# Allegro board IMLAB_F103C8.brd
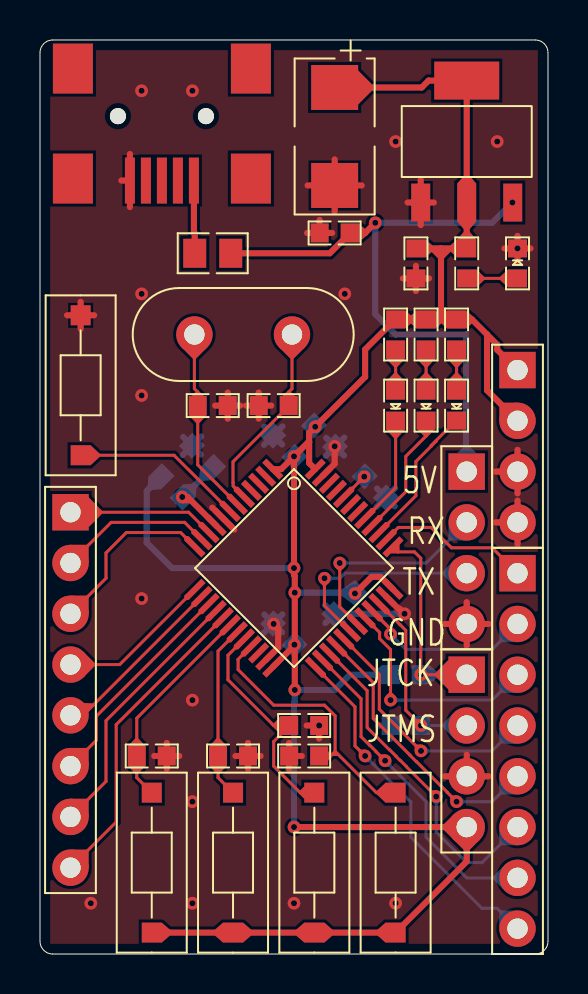
[diagram p0: board, top side]
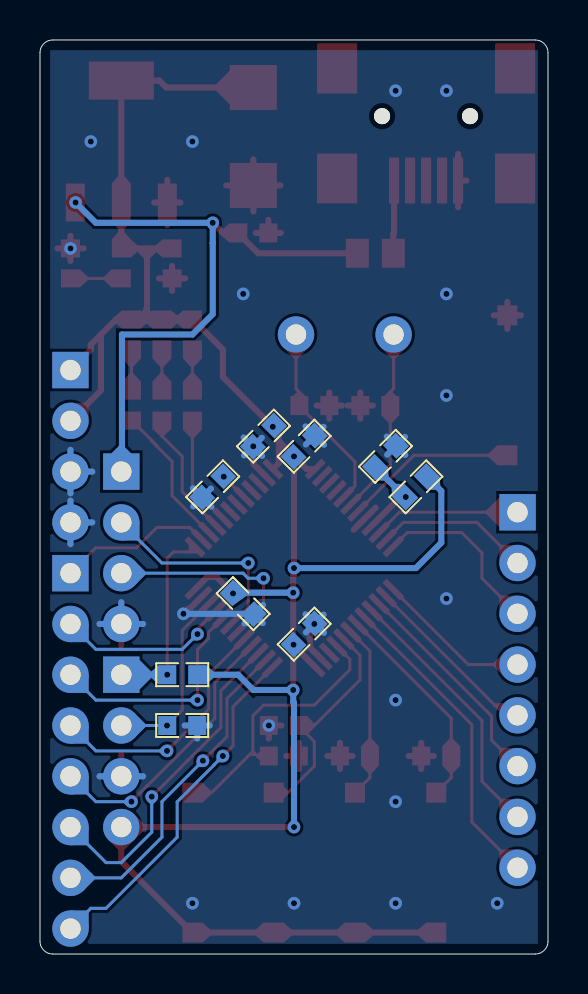
[diagram p1: board, bottom side, seen from below]

Outline 25.4 x 45.72 mm; copper layers: TOP, BOTTOM. Coordinates in mm from the lower left corner of the outline.
Outline path: 0,45.09 0,0.64 arc(0.19,0.19) 0.64,0 24.77,0 arc(25.21,0.19) 25.4,0.64 25.4,45.09 arc(25.21,45.53) 24.77,45.72 0.64,45.72 arc(0.19,45.53) 0,45.09

## Placement (name value [footprint] x y rotation side)
C1  20pF  [C0603]  11.68 27.43 180 top
C2  20pF  [C0603]  8.64 27.43 0 top
C3  1uF  [C0603]  14.73 36.07 0 top
C4  100uF  [C1812]  14.73 40.89 270 top
C5  100nF  [C0603]  18.8 34.54 90 top
C7  100nF  [C0603]  8.13 24.89 315 bottom
C8  100nF  [C0603]  12.19 25.4 315 bottom
C9  100nF  [C0603]  12.19 16 315 bottom
C10  100nF  [C0603]  15.24 17.53 45 bottom
C11  100nF  [C0603]  14.22 25.91 135 bottom
D1  LED  [LED0603]  23.88 34.54 270 top
D2  LED  [LED0603]  17.78 27.43 90 top
D3  LED  [LED0603]  19.3 27.43 90 top
D4  LED  [LED0603]  20.83 27.43 90 top
F1  500mA  [SF0805]  8.64 35.05 0 top
J1  Header4x1  [HEADER4X1]  21.34 20.32 0 top
J2  Header4x1  [HEADER4X1]  21.34 10.16 0 top
J3  Header8x1  [HEADER8X1]  1.52 13.21 0 top
J4  Header8x1  [HEADER8X1]  23.88 10.16 0 top
J5  Header4x1  [HEADER4X1]  23.88 25.4 0 top
L1  BEAD  [L0603]  6.6 23.37 315 bottom
R1  510R  [R0603]  21.34 34.54 90 top
R2  100K  [R0603]  16.76 23.37 135 bottom
R3  10K  [R0603]  18.29 13.97 180 bottom
R4  10K  [R0603]  18.29 11.43 180 bottom
R5  10K  [R0603]  5.59 9.91 180 top
R6  510R  [R0603]  17.78 30.99 90 top
R7  10K  [R0603]  9.65 9.91 180 top
R8  510R  [R0603]  19.3 30.99 90 top
R9  10K  [R0603]  13.21 11.43 180 top
R10  10K  [R0603]  13.21 9.91 0 top
R11  510R  [R0603]  20.83 30.99 90 top
S1  Switch_2pin  [SW3X6]  2.03 28.45 270 top
S2  Switch_2pin  [SW3X6]  5.59 4.57 90 top
S3  Switch_2pin  [SW3X6]  9.65 4.57 90 top
S4  Switch_2pin  [SW3X6]  13.72 4.57 90 top
S5  Switch_2pin  [SW3X6]  17.78 4.57 90 top
U1  STM32F103x8/B_LQFP48  [LQFP48P700X700]  12.7 19.3 225 top
U2  MiniUSB  [MINIUSB]  6.1 40.64 180 top
U3  AMS1117  [SOT223]  21.34 40.64 90 top
X1  8M  [HC49S]  10.16 30.99 0 top

## Library data of the parts
C1-C3 C5 C7-C11 = Capacitor
C4 = TCapactior
D1-D4 = LED
F1 = SafetyFuse
J1 J2 J5 = Header4x1
J3 J4 = Header8x1
L1 = Inductor
R1-R5 R7 R9 R10 = Resistor
R6 R8 R11 = R
S1-S5 = Switch_2pin
U1 = STM32F103x8/B_LQFP48
U2 = MiniUSB
U3 = AMS1117
X1 = Xtal

## Footprints (pads in the part's own frame, mm; a bottom-side part is the same pattern mirrored in y, then rotated)
C0603
  rect 0.9x0.95 smd: 1(-0.75,0) 2(0.75,0)
C1812
  rect 2.25x2.35 smd: 1(-2.45,0) 2(2.45,0)
HC49S
  round 1.82 hole 1.02: 1(-2.44,0) 2(2.44,0)
HEADER4X1
  rect 1.82x1.82 hole 1.02: 1(0,3.81)
  round 1.82 hole 1.02: 2(0,1.27) 3(0,-1.27) 4(0,-3.81)
HEADER8X1
  rect 1.82x1.82 hole 1.02: 1(0,8.89)
  round 1.82 hole 1.02: 2(0,6.35) 3(0,3.81) 4(0,1.27) 5(0,-1.27) 6(0,-3.81) 7(0,-6.35) 8(0,-8.89)
L0603
  rect 0.9x0.95 smd: 1(-0.75,0) 2(0.75,0)
LED0603
  rect 0.9x0.95 smd: 1(-0.75,0) 2(0.75,0)
LQFP48P700X700
  rect 0.3x1.2 smd: 1(-2.75,-4.25) 2(-2.25,-4.25) 3(-1.75,-4.25) 4(-1.25,-4.25) 5(-0.75,-4.25) 6(-0.25,-4.25) 7(0.25,-4.25) 8(0.75,-4.25) 9(1.25,-4.25) 10(1.75,-4.25) 11(2.25,-4.25) 12(2.75,-4.25) 25(2.75,4.25) 26(2.25,4.25) 27(1.75,4.25) 28(1.25,4.25) 29(0.75,4.25) 30(0.25,4.25) 31(-0.25,4.25) 32(-0.75,4.25) 33(-1.25,4.25) 34(-1.75,4.25) 35(-2.25,4.25) 36(-2.75,4.25)
  rect 1.2x0.3 smd: 13(4.25,-2.75) 14(4.25,-2.25) 15(4.25,-1.75) 16(4.25,-1.25) 17(4.25,-0.75) 18(4.25,-0.25) 19(4.25,0.25) 20(4.25,0.75) 21(4.25,1.25) 22(4.25,1.75) 23(4.25,2.25) 24(4.25,2.75) 37(-4.25,2.75) 38(-4.25,2.25) 39(-4.25,1.75) 40(-4.25,1.25) 41(-4.25,0.75) 42(-4.25,0.25) 43(-4.25,-0.25) 44(-4.25,-0.75) 45(-4.25,-1.25) 46(-4.25,-1.75) 47(-4.25,-2.25) 48(-4.25,-2.75)
MINIUSB
  rect 2x2.5 smd: (-4.45,1.85) (-4.45,-3.65) (4.45,1.85) (4.45,-3.65)
  round 0.8 hole 0.9 unplated: (-2.2,-1.27) (2.2,-1.27)
  rect 0.5x2.3 smd: 1(-1.6,1.95) 2(-0.8,1.95) 3(0,1.95) 4(0.8,1.95) 5(1.6,1.95)
R0603
  rect 0.9x0.95 smd: 1(-0.75,0) 2(0.75,0)
SF0805
  rect 1.15x1.45 smd: 1(-0.9,0) 2(0.9,0)
SOT223
  rect 1.9x0.95 smd: 1(-3.05,2.3) 2(-3.05,0) 3(-3.05,-2.3)
  rect 1.9x3.25 smd: 4(3.05,0)
SW3X6
  rect 1x1 smd: 1(-3.5,0) 2(3.5,0)

## Nets
AVDD: C7.2 L1.2 U1.9(VDDA)
GND: C1.2 C2.2 C3.1 C4.2 C5.1 C7.1 C8.1 C9.1 C10.1 C11.1 D1.1 J1.4 J2.3 J5.3 J5.4 R2.1 R4.2 R5.1 R7.1 R9.1 R10.1 S1.1 U1.8(VSSA) U1.23(VSS_1) U1.35(VSS_2) U1.47(VSS_3) U2.5(GND) U3.1(ADJ)
VDD: C4.1 C5.2 C8.2 C9.2 C10.2 C11.2 J2.4 J5.1 J5.2 L1.1 R1.2 R3.2 R6.2 R8.2 R11.2 S2.1 S3.1 S4.1 S5.1 U1.1(VBAT) U1.24(VDD_1) U1.36(VDD_2) U1.48(VDD_3) U3.2(VOUT1) U3.4(VOUT2)
BOOT0: R2.2 U1.44(BOOT0)
JTCK: J2.1 R3.1 U1.37(PA14)
JTMS: J2.2 R4.1 U1.34(PA13)
KEY0: R5.2 S2.2 U1.18(PB0)
KEY1: R7.2 S3.2 U1.19(PB1)
KEY2: R9.2 S4.2 U1.20(PB2)
KEY3: R10.2 S5.2 U1.21(PB10)
LED0: D4.1 U1.39(PB3)
LED1: D3.1 U1.40(PB4)
LED2: D2.1 U1.41(PB5)
NRST: S1.2 U1.7(NRST)
OSC_IN: C1.1 U1.5(PD0/OSC_IN) X1.2
OSC_OUT: C2.1 U1.6(PD1/OSC_OUT) X1.1
PA0: J3.1 U1.10(PA0/WKUP)
PA1: J3.2 U1.11(PA1)
PA2: J3.3 U1.12(PA2)
PA3: J3.4 U1.13(PA3)
PA4: J3.5 U1.14(PA4)
PA5: J3.6 U1.15(PA5)
PA6: J3.7 U1.16(PA6)
PA7: J3.8 U1.17(PA7)
PA8: J4.4 U1.29(PA8)
PA11: J4.3 U1.32(PA11)
PA12: J4.2 U1.33(PA12)
PA15: J4.1 U1.38(PA15)
PB12: J4.8 U1.25(PB12)
PB13: J4.7 U1.26(PB13)
PB14: J4.6 U1.27(PB14)
PB15: J4.5 U1.28(PB15)
RX: J1.2 U1.31(PA10)
TX: J1.3 U1.30(PA9)
U5V: C3.2 F1.2 J1.1 U3.3(VIN)
N01106: F1.1 U2.1(VCC)
N03159: D1.2 R1.1
N03492: U1.2(PC13/TAMPER/RTC)
N03498: U1.3(PC14/OSC32_IN)
N03504: U1.4(PC15/OSC32_OUT)
N04713: U1.22(PB11)
N05040: U1.46(PB9)
N05044: U1.45(PB8)
N05052: U1.43(PB7)
N05056: U1.42(PB6)
N149340: D3.2 R8.1
N149344: D4.2 R11.1
N149364: D2.2 R6.1

Pads without a net: U2 2 3 4

## Via types
v1: diameter 0.635, hole 0.305, TOP to BOTTOM, 42 vias

## Routing (per net, layer and track width the routed paths; a pad name or vN(x,y) marks a point on that pad's centre or on a via; arc(x,y) is an arc through that point)
AVDD: length 4.4
  TOP w0.305: U1.9 7.38,22.86 v1(7.11,22.86)
  BOTTOM w0.305: C7.2 L1.2
GND: length 88.2
  TOP w0.305: 9.39,26.78 C2.2 ; C2.2 10.01,27.43 ; C2.2 8.76,27.43 ; C2.2 9.39,28.08 ; J2.3 21.34,9.98 ; J2.3 20.25,8.89 ; J2.3 22.42,8.89 ; 18.38,37.59 U3.1 ; U3.1 19.04,38.72 ; U3.1 19.69,37.59 ; U3.1 19.04,36.46 ; 12.46,9.25 R10.1 ; R10.1 12.46,10.56 ; R10.1 13.09,9.91 ; 18.14,33.79 C5.1 ; C5.1 19.45,33.79 ; C5.1 18.8,33.17 ; C5.1 18.8,34.42 ; J5.3 23.88,25.22 ; J5.3 22.79,24.13 ; J5.3 23.88,23.04 ; 5.71,9.91 R5.1 ; R5.1 6.97,9.91 ; R5.1 6.34,10.56 ; R5.1 6.34,9.25 ; 10.4,9.25 R7.1 ; R7.1 9.77,9.91 ; R7.1 10.4,10.56 ; R7.1 11.03,9.91 ; 4.5,37.36 U2.5 ; U2.5 4.07,38.69 ; U2.5 4.5,40.02 ; 23.22,35.29 v1(23.88,35.29) ; v1(23.88,35.29) 24.53,35.29 ; v1(23.88,35.29) 23.88,35.92 ; v1(23.88,35.29) 23.88,34.67 ; U1.23 11.91,15.33 11.91,16.29 v1(11.68,16.51) ; 9.71,21.23 U1.8 8.61,22.33 ; S1.1 2.71,31.95 ; S1.1 2.03,31.27 ; S1.1 2.03,32.63 ; S1.1 1.35,31.95 ; C4.2 14.73,39.75 ; C4.2 13.38,38.44 ; C4.2 16.08,38.44 ; C4.2 14.73,37.14 ; 10.93,26.78 C1.2 ; C1.2 10.31,27.43 ; C1.2 11.56,27.43 ; C1.2 10.93,28.08 ; 21.34,15.42 J1.4 ; J1.4 22.42,16.51 ; J1.4 21.34,17.6 ; J1.4 20.25,16.51 ; 13.33,11.43 v1(13.96,11.43) 13.96,10.78 ; 13.35,36.07 C3.1 ; C3.1 14.61,36.07 ; C3.1 13.98,36.72 ; U1.35 17.92,17.27 17.98,17.27 v1(18.23,17.02) ; 23.88,20.5 J5.4 ; J5.4 22.79,21.59 ; J5.4 23.88,22.68 ; U1.47 14.74,24.52 v1(14.74,25.4)
  BOTTOM w0.305: 22.79,21.59 J5.4 ; J5.4 23.88,20.5 ; J5.4 23.88,22.68 ; 22.42,8.89 J2.3 20.25,8.89 ; J1.4 22.42,16.51 ; J1.4 20.25,16.51 ; J1.4 21.34,17.6 ; 14.31,25.82 C11.1 ; C11.1 14.29,24.92 ; C11.1 15.22,25.84 ; C11.1 15.2,24.93 ; C9.1 12.11,16.09 ; C9.1 11.22,16.98 ; C9.1 12.12,16.99 ; C9.1 11.2,16.07 ; 16.83,22.38 R2.1 ; R2.1 17.74,22.39 ; R2.1 17.76,23.3 ; R2.1 16.85,23.28 ; 11.22,26.37 C8.1 ; C8.1 12.11,25.49 ; C8.1 12.12,26.39 ; C8.1 11.2,25.47 ; C7.1 8.04,24.98 ; C7.1 7.15,25.87 ; C7.1 7.14,24.96 ; C7.1 8.06,25.88 ; 14.25,17.46 C10.1 ; C10.1 15.17,16.53 ; C10.1 14.27,16.55 ; C10.1 14.73,17.02 v1(18.23,17.02) ; 23.88,23.04 J5.3 ; J5.3 22.79,24.13 ; J5.3 23.88,25.22 ; R4.2 18.17,11.43 ; R4.2 16.91,11.43 ; R4.2 17.54,10.78
  vias: v1(2.54,2.54) v1(5.08,43.18) v1(5.08,33.02) v1(5.08,27.94) v1(5.08,17.78) v1(7.62,43.18) v1(7.62,12.7) v1(7.62,7.62) v1(7.62,2.54) v1(12.7,2.54) v1(15.24,33.02) v1(17.78,40.64) v1(17.78,2.54) v1(22.86,40.64)
VDD: length 115.2
  TOP w0.305: v1(12.7,6.35) J2.4 21.34,4.63 S5.1 S4.1 S3.1 S2.1 ; v1(12.7,24.89) v1(12.7,19.3) 12.7,18.96 12.74,18.92 v1(12.74,18.07) 12.74,15.45 ; v1(12.7,24.89) 12.06,24.25 U1.1 ; v1(12.7,24.89) 13.41,25.61 13.46,25.61 ; 20.07,31.74 R11.2 21.6,31.74 22.35,30.99 ; 20.07,31.74 R8.2 R6.2 17.76,31.74 16.26,30.24 16.26,28.87 v1(13.76,26.37) 13.46,26.07 13.46,25.61 ; 20.07,31.74 20.07,32.29 20.05,32.31 20.05,35.29 ; 22.35,30.99 22.35,28.19 J5.2 ; 22.35,30.99 22.86,30.48 22.86,30.23 J5.1 ; 20.05,35.29 C5.2 ; 20.05,35.29 R1.2 U3.2 U3.4 19.43,43.69 19.09,43.34 C4.1 ; v1(12.72,15.47) 12.72,15.44 ; 12.72,15.44 U1.24 ; 12.72,15.44 12.74,15.45 ; U1.48 13.46,24.56 13.46,25.61 ; U1.36 17.03,18.87 16.58,18.87 v1(15.75,18.03) ; 12.74,15.45 v1(12.74,13.21)
  BOTTOM w0.305: v1(12.74,18.07) 15.75,18.07 C10.2 ; R3.2 15.49,13.97 14.73,13.21 v1(12.74,13.21) 12.74,12.61 12.7,12.57 v1(12.7,6.35) ; L1.1 5.33,23.16 5.33,20.57 6.6,19.3 v1(12.7,19.3) ; C8.2 v1(12.7,24.89)
BOOT0: length 1.5
  TOP w0.152: U1.44 v1(16.21,23.88)
JTCK: length 12.3
  TOP w0.152: 18.8,13.97 v1(19.04,13.97) ; v1(19.04,13.97) J2.1 ; v1(19.04,13.97) 19.04,19.8 18.72,20.11 17.9,20.11 U1.37
  BOTTOM w0.152: J2.1 v1(19.04,13.97)
JTMS: length 9.3
  TOP w0.152: U1.34 17.68,16.8 17.68,16.79 18,16.47 18.01,16.47 18.29,16.19 18.29,12.19 v1(19.05,11.43)
  BOTTOM w0.152: J2.2 v1(19.05,11.43) R4.1
KEY0: length 10.7
  TOP w0.152: U1.18 4.84,11.8 R5.2 4.84,8.82 S2.2
KEY1: length 8.8
  TOP w0.152: S3.2 8.9,8.82 R7.2 8.9,15.15 U1.19
KEY2: length 11.3
  TOP w0.152: S4.2 13.01,8.07 11.68,9.4 11.68,10.63 12.46,11.41 R9.2 11.68,11.43 9.4,13.72 9.4,14.94 U1.20
KEY3: length 13.8
  TOP w0.152: 14.76,10.13 14.76,11.91 14.22,12.45 11.68,12.45 9.91,14.22 9.91,14.73 9.9,14.74 U1.21 ; 14.76,10.13 16.82,8.07 S5.2 ; 14.76,10.13 14.53,9.91 R10.2
LED0: length 7.6
  TOP w0.152: 19.56,25.4 19.81,25.65 19.81,25.69 ; 19.56,25.4 18.8,24.64 18.8,22.93 U1.39 ; 19.56,25.4 19.56,25.44 19.81,25.69 ; D4.1 20.8,26.68 19.81,25.69
LED1: length 6.4
  TOP w0.152: D3.1 19.3,25.91 18.29,24.89 18.29,23.12 U1.40
LED2: length 5.5
  TOP w0.152: U1.41 17.78,23.32 D2.1
NRST: length 8.7
  TOP w0.152: S1.2 6.7,24.95 U1.7
OSC_IN: length 9.6
  TOP w0.152: U1.5 9.66,23.41 9.66,23.58 9.65,23.58 9.65,24.62 12.43,27.41 C1.1 12.43,28.11 12.6,28.28 X1.2
OSC_OUT: length 9.4
  TOP w0.152: U1.6 7.89,24.47 C2.1 7.89,28.11 7.72,28.28 X1.1
PA0: length 7.4
  TOP w0.152: J3.1 7.43,22.1 U1.10
PA1: length 7.8
  TOP w0.152: J3.2 3.56,21.59 7.23,21.59 U1.11
PA2: length 9
  TOP w0.152: 7.75,20.41 U1.12 7.03,21.08 4.32,21.08 3.3,20.07 3.3,18.8 J3.3
PA3: length 7.8
  TOP w0.152: U1.13 3.98,14.48 J3.4
PA4: length 9
  TOP w0.152: J3.5 2.03,12.45 2.66,12.45 U1.14
PA5: length 11
  TOP w0.152: U1.15 2.82,11.9 2.82,10.69 J3.6
PA6: length 13.3
  TOP w0.152: J3.7 3.3,8.64 3.3,11.67 U1.16
PA7: length 15.7
  TOP w0.152: J3.8 3.81,6.6 3.81,11.47 U1.17
PA8: length 12.6
  TOP w0.152: U1.29 16.97,13.98 16.97,12.24 v1(19.05,10.16)
  BOTTOM w0.152: v1(19.05,10.16) 22.61,10.16 J4.4
PA11: length 11.5
  TOP w0.152: U1.32 16.98,16.08 16.98,15.78 17.53,15.23 v1(17.53,12.7)
  BOTTOM w0.152: J4.3 22.61,12.7 v1(17.53,12.7)
PA12: length 10.1
  TOP w0.152: 17.53,16.26 16.6,17.18 U1.33 17.52,16.26 17.53,16.26 ; 17.53,16.26 v1(17.53,16)
  BOTTOM w0.152: v1(17.53,16) 18.29,15.24 22.61,15.24 J4.2
PA15: length 7.8
  TOP w0.152: J4.1 22.61,20.32 20.57,20.32 19.56,21.34 17.91,21.34 U1.38
PB12: length 17.7
  TOP w0.152: v1(16.26,9.91) 15.75,10.41 15.75,12.37 U1.25
  BOTTOM w0.152: v1(16.26,9.91) 16.71,9.45 16.71,9.44 18.54,7.61 18.54,5.84 22.1,2.29 22.86,2.29 J4.8
PB13: length 16.4
  TOP w0.152: v1(17.25,9.67) 16.8,10.12 16.8,10.13 16.48,10.45 16.47,10.45 16.05,10.87 16.05,12.77 U1.26
  BOTTOM w0.152: J4.7 21.34,3.81 19.3,5.84 19.3,7.62 v1(17.25,9.67)
PB14: length 16.6
  TOP w0.152: v1(19.81,7.87) 18.33,9.36 18.33,9.37 18.01,9.69 18,9.69 17.8,9.88 17.8,9.9 17.48,10.22 17.47,10.22 16.36,11.33 16.36,13.17 U1.27
  BOTTOM w0.152: v1(19.81,7.87) 19.81,6.1 21.34,4.57 22.1,4.57 J4.6
PB15: length 13.9
  TOP w0.152: v1(20.83,7.62) 20.36,8.09 20.36,8.1 20.04,8.42 20.03,8.42 18.83,9.61 18.82,9.61 18.5,9.93 18.5,9.94 16.66,11.79 16.66,13.57 U1.28
  BOTTOM w0.152: J4.5 22.61,7.62 v1(20.83,7.62)
RX: length 10.6
  TOP w0.152: U1.31 14.99,17.37 v1(14.99,19.56)
  BOTTOM w0.152: J1.2 19.3,19.56 v1(14.99,19.56)
TX: length 10.4
  TOP w0.152: v1(14.22,18.8) 14.22,17.43 U1.30
  BOTTOM w0.152: v1(14.22,18.8) 15,18.8 15.25,19.05 J1.3
U5V: length 31.6
  TOP w0.305: F1.2 14.49,35.05 15.48,36.04 C3.2 16.26,36.07 v1(16.76,36.58)
  BOTTOM w0.305: v1(23.62,37.59) 22.61,36.58 v1(16.76,36.58) 16.76,35.56 16.76,32 17.78,30.99 21.3,30.99 21.3,25.35 21.34,25.32 J1.1
N01106: length 3.7
  TOP w0.305: F1.1 7.74,36.06 7.7,36.1 U2.1
N03159: length 2.5
  TOP w0.152: R1.1 D1.2
N149340: length 2.1
  TOP w0.152: D3.2 R8.1
N149344: length 2.1
  TOP w0.152: D4.2 R11.1
N149364: length 2.1
  TOP w0.152: D2.2 R6.1

## Copper pours and planes (outline as drawn; the poured copper is in the pictures)
GND on TOP: 0.51,0.51 0.51,45.21 24.89,45.21 24.89,0.51 ; 13 cut-outs
GND on BOTTOM: 0.51,0.51 0.51,45.21 24.89,45.21 24.89,0.51 ; 6 cut-outs
VDD on TOP (solid shape): 16.66,43.44 16.69,43.34 16.66,43.25 15.91,42.49 14.69,43.34 15.91,44.19
JTCK on TOP (solid shape): 21.36,13.97 20.43,13.23 19.73,13.92 19.71,13.97 19.73,14.02 20.43,14.71
JTCK on BOTTOM (solid shape): 21.36,13.97 20.43,13.23 19.73,13.92 19.71,13.97 19.73,14.02 20.43,14.71
PA0 on TOP (solid shape): 3.13,22.15 3.15,22.1 3.13,22.05 2.43,21.36 1.5,22.1 2.43,22.84
VDD on TOP (solid shape): 6.56,1.16 6.59,1.07 6.56,0.99 6.09,0.57 5.55,1.07 6.09,1.57
VDD on TOP (solid shape): 9.69,1.07 9.15,0.57 8.68,0.99 8.65,1.07 8.68,1.16 9.15,1.57
VDD on TOP (solid shape): 10.62,1.16 10.65,1.07 10.62,0.99 10.15,0.57 9.61,1.07 10.15,1.57
VDD on TOP (solid shape): 13.75,1.07 13.22,0.57 12.74,0.99 12.72,1.07 12.74,1.16 13.22,1.57
VDD on TOP (solid shape): 14.69,1.16 14.72,1.07 14.69,0.99 14.22,0.57 13.68,1.07 14.22,1.57
VDD on TOP (solid shape): 17.82,1.07 17.28,0.57 16.81,0.99 16.78,1.07 16.81,1.16 17.28,1.57
VDD on TOP (solid shape): 21.25,38.99 21.34,39.01 21.42,38.99 21.81,38.54 21.34,37.55 20.86,38.54
VDD on TOP (solid shape): 21.81,36.64 21.42,36.19 21.34,36.17 21.25,36.19 20.86,36.64 21.34,37.63
VDD on TOP (solid shape): 21.37,6.35 20.69,5.71 20.16,6.24 20.11,6.35 20.16,6.46 20.69,6.99
VDD on TOP (solid shape): 21.98,5.71 21.44,5.17 21.34,5.13 21.23,5.17 20.69,5.71 21.34,6.39
VDD on BOTTOM (solid shape): 15.81,18.06 15.79,17.4 15.01,17.97 14.96,18.07 15.01,18.18 15.75,18.71
JTMS on BOTTOM (solid shape): 21.36,11.43 20.69,10.79 20.1,11.38 20.08,11.43 20.1,11.48 20.69,12.07
KEY3 on TOP (solid shape): 17.8,8.07 17.28,7.57 16.8,8.02 16.78,8.07 16.8,8.12 17.28,8.57
NRST on TOP (solid shape): 3.01,25 3.03,24.95 3.01,24.9 2.53,24.45 2.01,24.95 2.53,25.45
OSC_IN on TOP (solid shape): 13.24,30.34 12.65,29.75 12.6,29.73 12.55,29.75 11.96,30.34 12.6,31.01
OSC_OUT on TOP (solid shape): 8.36,30.34 7.77,29.75 7.72,29.73 7.67,29.75 7.08,30.34 7.72,31.01
PA3 on TOP (solid shape): 2.76,14.53 2.78,14.48 2.76,14.42 2.17,13.83 1.5,14.48 2.17,15.12
PB13 on BOTTOM (solid shape): 23.9,3.81 23.23,3.17 22.64,3.76 22.62,3.81 22.64,3.86 23.23,4.45
TX on BOTTOM (solid shape): 21.36,19.05 20.69,18.41 20.1,19 20.08,19.05 20.1,19.1 20.69,19.69
U5V on BOTTOM (solid shape): 21.26,25.45 21.34,25.47 21.41,25.45 21.83,25.04 21.34,24.09 20.84,25.04

Small or netless copper shapes (teardrops, artwork), in the pictures only: 97 on TOP, 29 on BOTTOM

## Text on the board
Ref Des/Silkscreen Top: JTCK | JTMS | GND | 5V | TX | RX
PLACE_BOUND_TOP: FIGURE | SIZE | 12.0 | 40.157 | 35.433 | DRILL CHART: TOP to BOTTOM | ALL UNITS ARE IN MILS | PLATED | NON-PLATED | QTY | 42 | 30 | 2
